# Altium PCB 四轴.PcbDoc
Units mm, origin at the board's own origin, x right, y up, seen from the top; angles counter-clockwise.
Board outline 99.94 x 99.97 mm, 2 copper layers (Top Layer, Bottom Layer); 57 components, 46 nets, 217 pads, 47 vias.
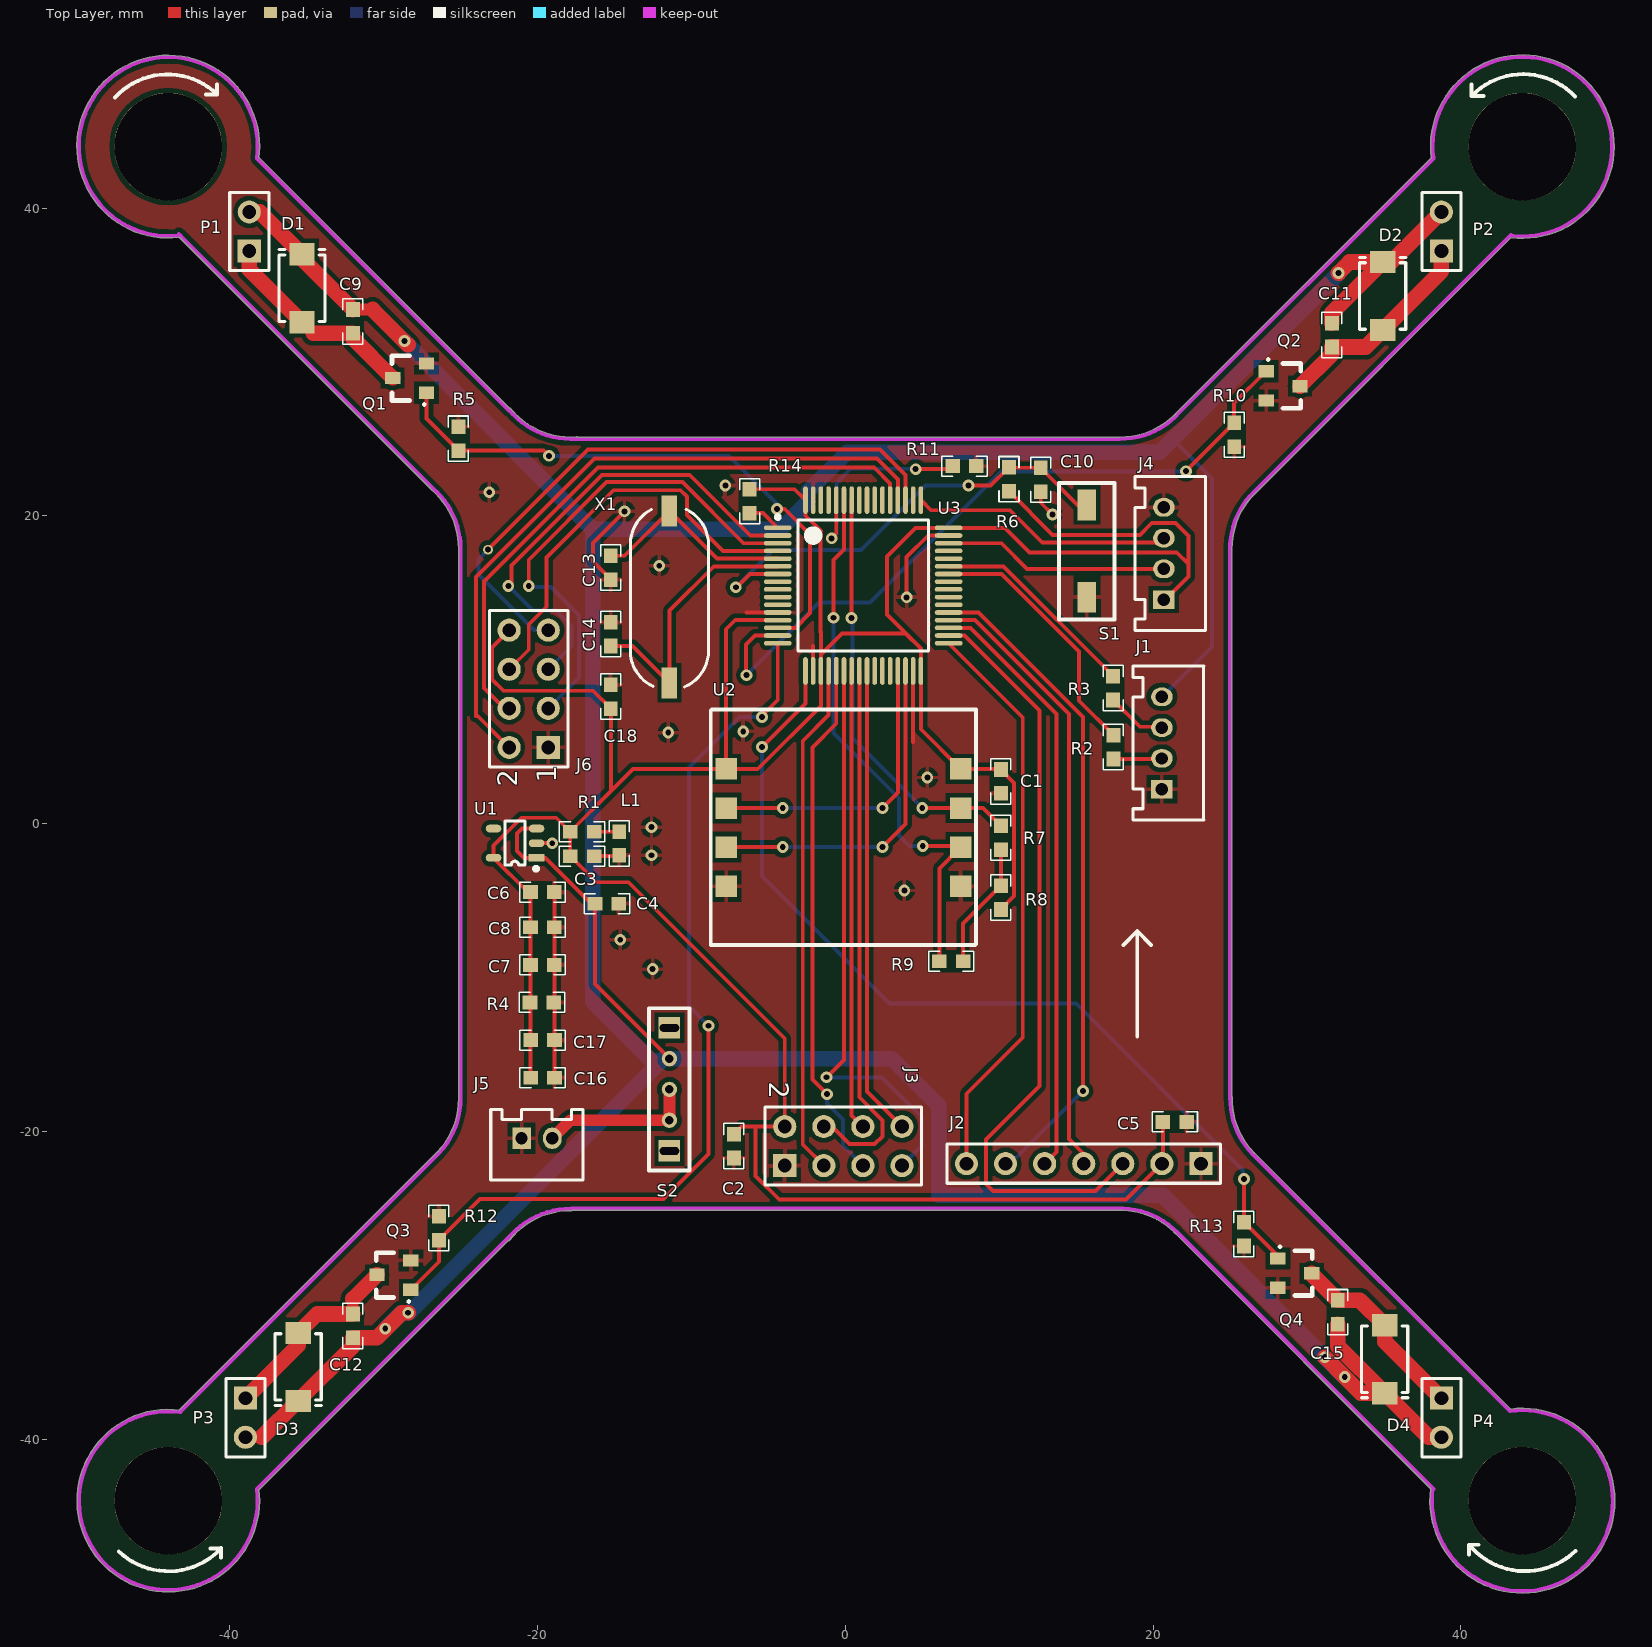
[diagram p0: Top Layer view]
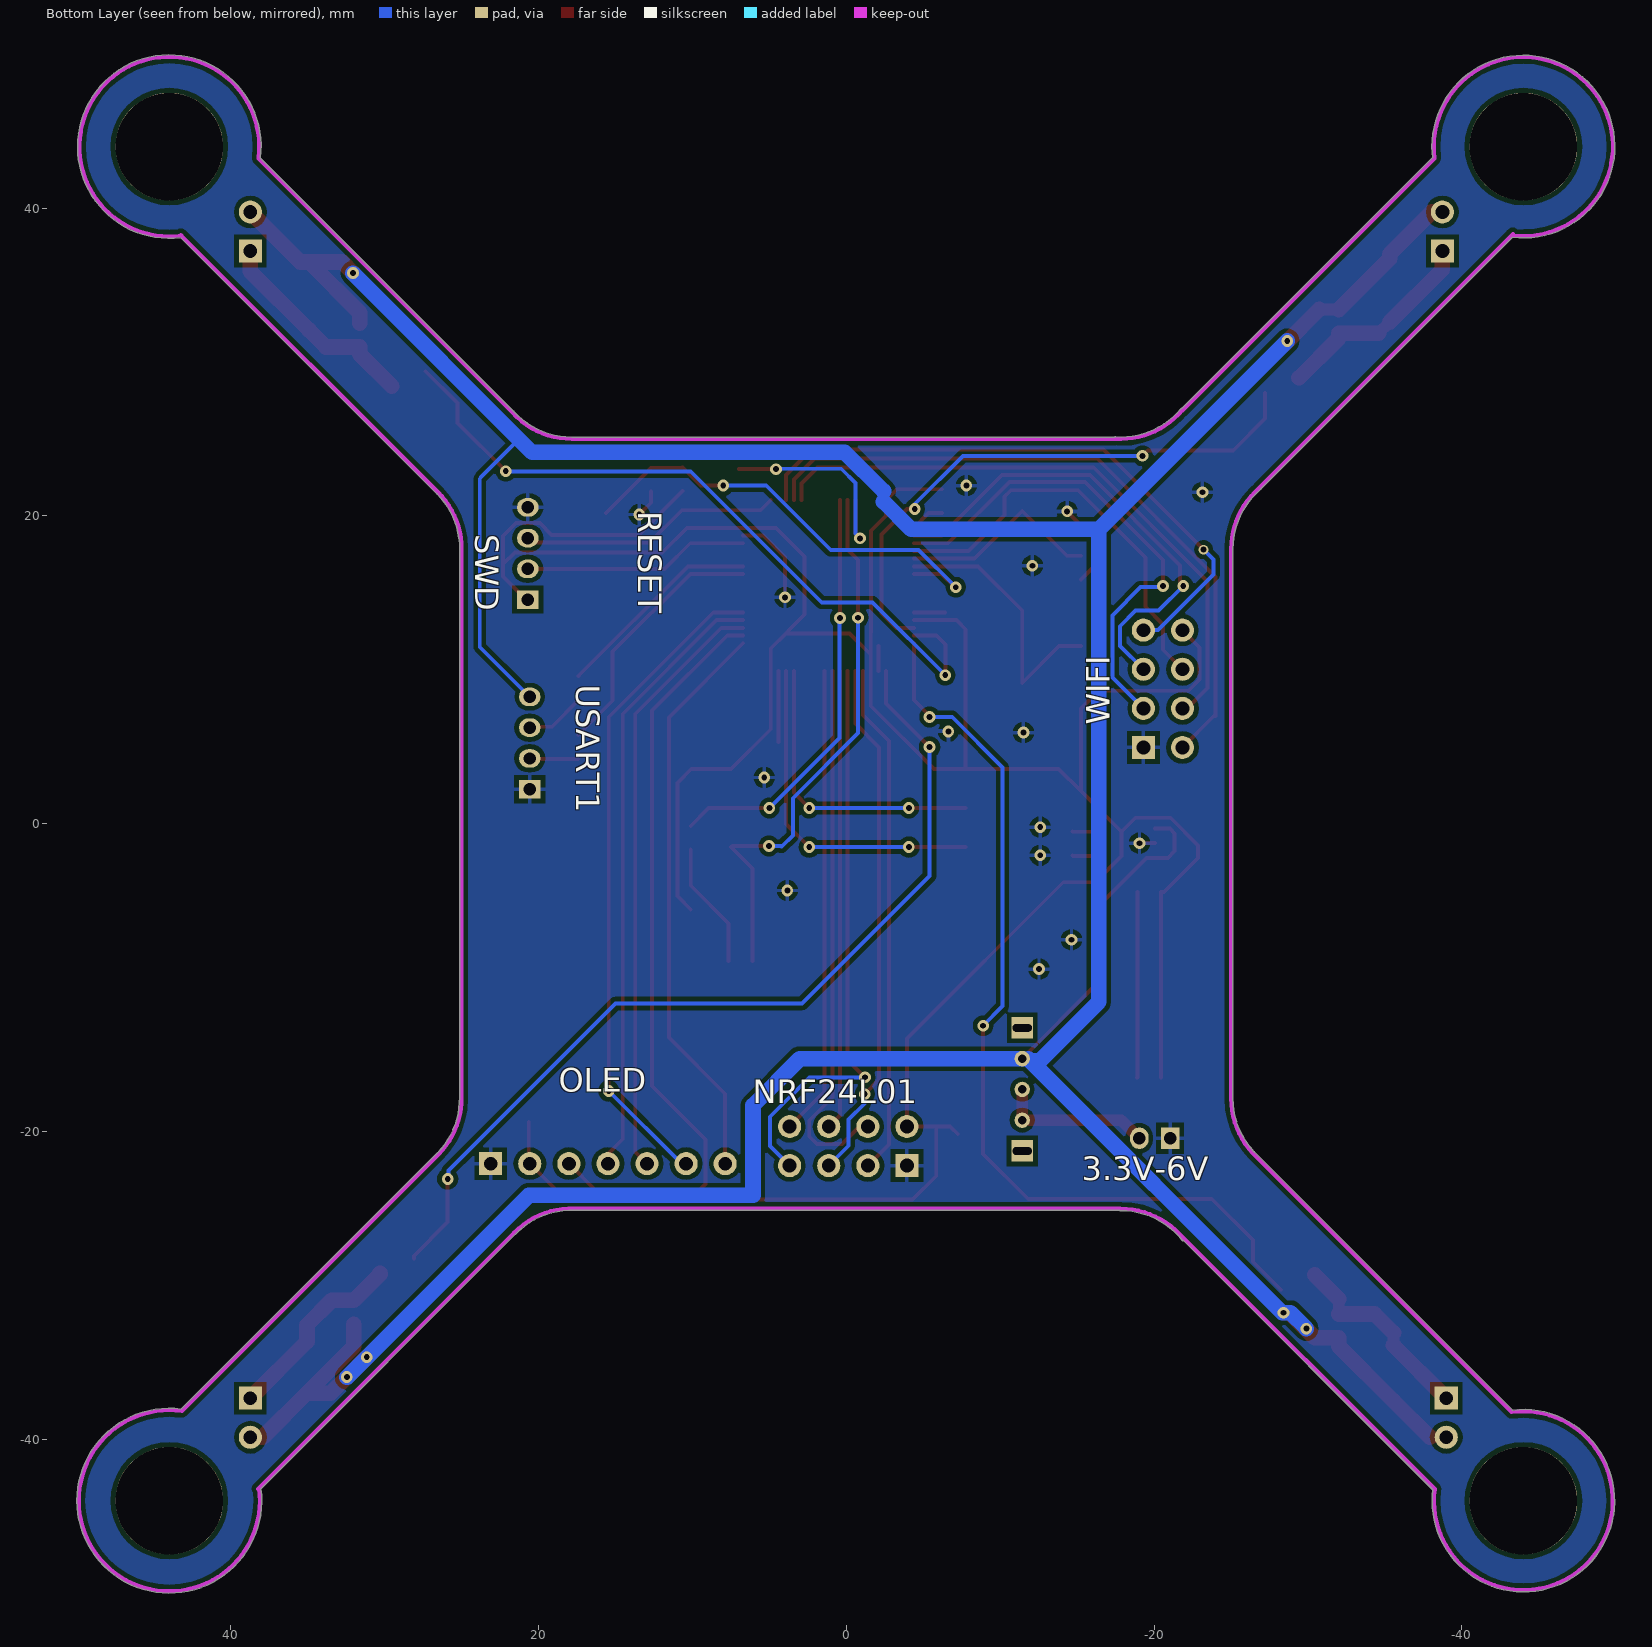
[diagram p1: Bottom Layer view, seen from below]

## Layer stack, top to bottom
Top Layer: signal copper 0.0356
Dielectric: dielectric 0.32, FR-4, Dk 4.8
Bottom Layer: signal copper 0.0356

## Board outline
-43.293,-38.112 ccw(c-44,-44) -38.07,-44 ccw(c-44,-44) -38.112,-43.293 -21.937,-27.118 ccw(c-21.929,-26.991) -21.829,-27.07 cw(c-17.856,-30.226) -17.828,-25.152 ccw(c-17.827,-25.024) -17.752,-25.127 17.63,-25.127 ccw(c17.653,-25.002) 17.658,-25.129 cw(c17.85,-30.2) 21.473,-26.647 ccw(c21.583,-26.583) 21.493,-26.673 38.044,-43.224 ccw(c44,-44) 50.006,-44 ccw(c44,-44) 43.224,-38.044 26.587,-21.406 ccw(c26.496,-21.496) 26.573,-21.395 cw(c30.21,-17.856) 25.136,-17.784 ccw(c25.009,-17.783) 25.136,-17.783 ccw(c25.009,-17.783) 25.127,-17.736 25.127,17.831 ccw(c25,17.831) 25.126,17.847 cw(c30.201,17.856) 26.602,21.433 ccw(c26.55,21.55) 26.64,21.46 43.264,38.084 ccw(c44,44) 49.961,44 ccw(c44,44) 38.084,43.264 21.622,26.802 ccw(c21.703,26.704) 21.608,26.789 cw(c17.852,30.201) 17.84,25.126 ccw(c17.824,25) 17.824,25.127 -17.434,25.127 ccw(c-17.484,25.01) -17.493,25.137 cw(c-17.833,30.2) -21.736,26.957 ccw(c-21.834,26.876) -21.823,27.003 -38.104,43.284 ccw(c-44,44) -38.061,44 ccw(c-44,44) -43.284,38.104 -26.944,21.764 ccw(c-26.824,21.808) -26.907,21.711 cw(c-30.2,17.85) -25.126,17.874 ccw(c-25,17.854) -25.127,17.854 -25.127,-17.856 ccw(c-25,-17.856) -25.126,-17.872 cw(c-30.201,-17.856) -26.494,-21.321 ccw(c-26.434,-21.434) -26.524,-21.344

## Design rules (kind name [scope] priority, off if disabled: settings)
Clearance Clearance_1 [InPolygon] p1: gap=0.3
Clearance mcu [InComponent('U3')] p2: gap=0.178
Clearance [All] p3: gap=0.203
ComponentClearance [All] p1: gap=0.025 collisioncheckmode=3 verticalgap=0.025 showdistances=FALSE
HoleSize [All] p1: absolutevalues=TRUE maxlimit=7.62 minlimit=0.203 maxpercent=80.000 minpercent=20.000
MinimumSolderMaskSliver [All] p1: minsoldermaskwidth=0.127
PolygonConnect [All] p1: connectstyle=Relief reliefconductorwidth=0.254 reliefentries=4 polygonreliefangle="90 Angle"
RoutingVias [All] p1: holewidth=0.381 width=0.762 viastyle="Through Hole" minholewidth=0.127 minwidth=0.254 maxholewidth=1.016 maxwidth=1.27
SilkToSilkClearance [All] p1: silktosilkclearance=0.178
SilkscreenOverComponentPads [All] p1: minsilkscreentomaskgap=0.127
SolderMaskExpansion [All] p1: expansion=0.102
Width [All] p1: maxlimit=1.27 minlimit=0.254 preferedwidth=0.254
23 further rules are at their usual default settings.

## Components (designator, comment, footprint, x,y, rotation, side; value= is the part's Value field where it differs from the comment)
C1 "100nF" 0603 10.109,2.743 r270 top
C2 "100nF" 0603 -7.239,-20.955 r270 top
C3 "100nF" 0603 -17.102,-2.114 r0 top
C4 "1uF" 0603 -15.494,-5.207 r180 top
C5 "100nF" 0603 21.412,-19.38 r0 top
C6 "10uF" 0603 -19.685,-4.445 r0 top
C7 "10uF" 0603 -19.685,-9.176 r180 top
C8 "100nF" 0603 -19.685,-6.731 r180 top
C9 "100nF" 0603 -32.004,32.639 r90 top
C10 "100nF" 0603 12.7,22.352 r270 top
C11 "100nF" 0603 31.623,31.75 r90 top
C12 "100nF" 0603 -32.004,-32.639 r270 top
C13 "20pF" 0603 -15.24,16.637 r90 top
C14 "20pF" 0603 -15.24,12.319 r270 top
C15 "100nF" 0603 32.004,-31.75 r270 top
C16 "1uF" 0603 -19.672,-16.51 r180 top
C17 "100nF" 0603 -19.672,-14.065 r180 top
C18 "100nF" 0603 -15.24,8.255 r90 top
D1 "SS14" SMA -35.306,34.798 r90 top
D2 "SS14" SMA 34.925,34.29 r90 top
D3 "SS14" SMA -35.56,-35.306 r270 top
D4 "SS14" SMA 35.052,-34.798 r270 top
J1 "PH2.0-4P" PH2.0-4P 20.574,7.239 r90 top
J2 "Header 7" HDR1X7 23.114,-22.098 r180 top
J3 "Header 4X2" HDR2X4 -3.937,-22.225 r0 top
J4 "PH2.0-4P" PH2.0-4P 20.701,19.558 r90 top
J5 "Header 2" PH2.0-2P -20.041,-20.447 r0 top
J6 "Header 4X2" HDR2X4 -19.304,4.953 r90 top
L1 "LED" 0603 -14.689,-1.289 r270 top
P1 "Header 2" HDR1X2 -38.735,37.211 r90 top
P2 "Header 2" HDR1X2 38.735,37.211 r90 top
P3 "Header 2" HDR1X2 -38.989,-37.338 r270 top
P4 "Header 2" HDR1X2 38.735,-37.338 r270 top
Q1 "AO3400" SOT-23 -28.321,28.956 r180 top
Q2 "AO3400" SOT-23 28.448,28.448 r0 top
Q3 "AO3400" SOT-23 -29.337,-29.337 r180 top
Q4 "AO3400" SOT-23 29.21,-29.21 r0 top
R1 "1K" 0603 -17.102,-0.527 r180 top
R2 "10R" 0603 17.424,4.978 r90 top
R3 "10R" 0603 17.399,8.814 r90 top
R4 "1K" 0603 -19.717,-11.62 r180 top
R5 "100K" 0603 -25.146,25.019 r270 top
R6 "10K" 0603 10.638,22.386 r90 top
R7 "10K" 0603 10.109,-0.914 r270 top
R8 "0R" 0603 10.109,-4.801 r90 top
R9 "10K" 0603 6.883,-8.941 r0 top
R10 "100K" 0603 25.273,25.273 r90 top
R11 "10K" 0603 7.747,23.241 r0 top
R12 "100K" 0603 -26.416,-26.289 r270 top
R13 "100K" 0603 25.908,-26.67 r90 top
R14 "0R" 0603 -6.223,20.955 r270 top
S1 "SW-PB" SW-KEY 17.501,21.717 r270 top
S2 "SS12D07" SS-12D07 -11.43,-17.272 r270 top
U1 "XC6503D331" SOT23-5 -21.463,-1.27 r180 top
U2 "MPU6050S" MPU6050S -7.747,3.556 r0 top
U3 "STM32F103RCT6" LQFP64_N 1.162,15.475 r0 top
X1 "8M" HC-49SMD -11.43,14.732 r90 top

## Footprints (in the part's own frame and the unit in brackets; to place one, negate y for a bottom-side part, rotate by r counter-clockwise, add the part's x,y. Pads: shape width x height; smd on the part's side, far side on the other; paste and mask are expansions set on the pad)
0603 [mm]
  rect 0.95x0.9 smd: 1(-0.775,0) 2(0.775,0)
  silkscreen extent -1.48,-0.65 1.47,0.65
HC-49SMD [mm]
  rect 2x1 smd: 1(-5.588,0) 2(5.588,0)
  silkscreen extent -5.84,-2.54 5.7,2.54
HDR1X2 [mm] "Connector; Header; 2 Po"
  rect 1.5x1.5 hole 0.9: 1(0,0)
  round 1.5 hole 0.9: 2(2.54,0)
  silkscreen extent -1.27,-1.27 3.81,1.27
HDR1X7 [mm] "Connector; Header; 7 Po"
  rect 1.5x1.5 hole 0.9: 1(0,0)
  round 1.5 hole 0.9: 2(2.54,0) 3(5.08,0) 4(7.62,0) 5(10.16,0) 6(12.7,0) 7(15.24,0)
  silkscreen extent -1.27,-1.27 16.51,1.27
HDR2X4 [mm] "Connector; Header; 4x2 Po"
  rect 1.5x1.5 hole 0.9: 1(0,0)
  round 1.5 hole 0.9: 2(0,2.54) 3(2.54,0) 4(2.54,2.54) 5(5.08,0) 6(5.08,2.54) 7(7.62,0) 8(7.62,2.54)
  silkscreen extent -1.27,-1.27 8.89,3.81
LQFP64_N [mm] "Thin QFP, 64-Leads, Body 10x10mm,"
  oval 1.8x0.3 smd: 1(-5.55,3.75) 2(-5.55,3.25) 3(-5.55,2.75) 4(-5.55,2.25) 5(-5.55,1.75) 6(-5.55,1.25) 7(-5.55,0.75) 8(-5.55,0.25) 9(-5.55,-0.25) 10(-5.55,-0.75) 11(-5.55,-1.25) 12(-5.55,-1.75) 13(-5.55,-2.25) 14(-5.55,-2.75) 15(-5.55,-3.25) 16(-5.55,-3.75) 33(5.55,-3.75) 34(5.55,-3.25) 35(5.55,-2.75) 36(5.55,-2.25) 37(5.55,-1.75) 38(5.55,-1.25) 39(5.55,-0.75) 40(5.55,-0.25) 41(5.55,0.25) 42(5.55,0.75) 43(5.55,1.25) 44(5.55,1.75) 45(5.55,2.25) 46(5.55,2.75) 47(5.55,3.25) 48(5.55,3.75)
  oval 0.3x1.8 smd: 17(-3.75,-5.55) 18(-3.25,-5.55) 19(-2.75,-5.55) 20(-2.25,-5.55) 21(-1.75,-5.55) 22(-1.25,-5.55) 23(-0.75,-5.55) 24(-0.25,-5.55) 25(0.25,-5.55) 26(0.75,-5.55) 27(1.25,-5.55) 28(1.75,-5.55) 29(2.25,-5.55) 30(2.75,-5.55) 31(3.25,-5.55) 32(3.75,-5.55) 49(3.75,5.55) 50(3.25,5.55) 51(2.75,5.55) 52(2.25,5.55) 53(1.75,5.55) 54(1.25,5.55) 55(0.75,5.55) 56(0.25,5.55) 57(-0.25,5.55) 58(-0.75,5.55) 59(-1.25,5.55) 60(-1.75,5.55) 61(-2.25,5.55) 62(-2.75,5.55) 63(-3.25,5.55) 64(-3.75,5.55)
  silkscreen extent -5.67,-4.25 4.25,4.57, body extent -5,-5 5,5, height 1.6
MPU6050S [mm]
  rect 1.4x1.4 smd: 1(0,0) 2(0,-2.54) 3(0,-5.08) 4(0,-7.62) 5(15.24,0) 6(15.24,-2.54) 7(15.24,-5.08) 8(15.24,-7.62)
  silkscreen extent -1,-11.43 16.25,3.88
PH2.0-2P [mm]
  rect 1.2x1.4 hole 0.8: 1(-1,0)
  oval 1.2x1.4 hole 0.8: 2(1,0)
  silkscreen extent -3.01,-2.72 3,1.88
PH2.0-4P [mm]
  rect 1.2x1.4 hole 0.8: 1(-5,0)
  oval 1.2x1.4 hole 0.8: 2(-3,0) 3(-1,0) 4(1,0)
  silkscreen extent -7.01,-2.72 3,1.88
SMA [mm]
  rect 1.45x1.65 smd: 1(-2.21,0) 2(2.21,0)
  silkscreen extent -2.16,-1.5 2.51,1.5
SOT23-5 [mil] "SOT23, 5-Leads, Body 3.1x3.0mm (max), Pitch 0.95mm, IPC Me"
  rect 40x20 smd: 1(-55,37.4)
  oval 40x20 smd: 2(-55,0) 3(-55,-37.4) 4(55,-37.4) 5(55,37.4)
  silkscreen extent -59,-57 26,70
SOT-23 [mm]
  rect 1x0.8 smd: 1(-1.1,0.953) 2(-1.1,-0.953) 3(1.1,-0.013)
  silkscreen extent -0.97,-1.46 1.14,1.71
SS-12D07 [mm]
  round 1 hole 0.55: 1(-2,0) 2(0,0) 3(2,0)
  rect 1.4x1.4 hole 0.5 slot 1.25 at 90 deg: ""(-4,0) ""(4,0)
  silkscreen extent -5.28,-1.33 5.28,1.3
SW-KEY [mm] "R"
  rect 2x1.2 smd: 1(1,-1.8) 2(7,-1.8)
  silkscreen extent -0.43,-3.6 8.45,0

## Part data
C1 C2 C3 C4 C5 C6 C7 C8 C9 C10 C11 C12 C13 C14 C15 C16 C17 C18: library part Cap, "Capacit"
J1 J4: library part "Header 4", "Header, 4-P"
J2: "Header, 7-Pin"
J3 J6: "Header, 4-Pin, Dual row"
J5: "Header, 2-P"
L1: library part L
P1 P2 P3 P4: "Header, 2-Pin"
Q1 Q2 Q3 Q4: library part MOS-N, "N-Channel"
R1 R2 R3 R4 R5 R6 R7 R8 R9 R10 R11 R12 R13 R14: library part Res1, "Resist"
S1: "Switch"
S2: library part S
U1: library part XC6503Dxxx
U3: "256K Flash 48K RAM"
X1: library part XT

## Free pads (board coordinates)
  round 7 hole 7: 0(-44,-44) 0(-44,44) 0(44,-44) 0(44,44)

## Via types
v1: diameter 0.762, hole 0.381, Top Layer to Bottom Layer, tented both sides, 46 vias
v2: diameter 0.635, hole 0.381, Top Layer to Bottom Layer, tented both sides, 1 vias

## Nets (pads, with @x,y where several pads share a name; then routed paths per layer and width w, separated by ;. In a path a pad name is that pad's centre, name@x,y a point inside that pad or via, vN(x,y) a via of type N, cw(c..) or ccw(c..) an arc to the next point about the centre after c; other vN are vias at no path point)
BOOT0: R11.1 U3.60 | length 14.3
  Top Layer w0.254: v1(-0.889,18.542) -0.588,18.843 U3.60 ; v1(4.572,23.038) R11.1@6.972,23.038
  Bottom Layer w0.254: v1(-0.889,18.542) -0.584,18.847 -0.584,22.149 0.33,23.063 4.394,23.063 v1(4.572,23.038)
ESP_CH_PD: J6.4 U3.53 | length 40.1
  Top Layer w0.254: J6.4 -22.149,7.493 -23.47,8.814 -23.47,15.748 -16.078,23.139 1.88,23.139 2.912,22.107 U3.53
ESP_GP0: J6.5 U3.2 | length 31.4
  Top Layer w0.254: v1(-21.898,15.446) -21.692,15.652 -21.692,16.789 -15.824,22.657 -10.109,22.657 -6.177,18.725 U3.2
  Bottom Layer w0.254: v1(-21.898,15.446) -20.295,13.843 -18.796,13.843 -17.78,12.827 -17.78,11.557 J6.5
ESP_GP2: J6.3 U3.3 | length 32.6
  Top Layer w0.254: v1@-20.574,15.367 -20.574,17.145 -15.519,22.2 -10.592,22.2 -6.617,18.225 U3.3
  Bottom Layer w0.254: v1@-20.574,15.367 -19.126,15.367 -17.297,13.538 -17.297,9.5 J6.3
  other v1: -20.574,15.446
ESP_GP16: J6.6 U3.4 | length 27.4
  Top Layer w0.254: J6.6 -20.574,11.303 -20.574,12.954 -19.431,14.097 -19.431,17.297 -15.062,21.666 -10.705,21.666 -10.287,21.248 -10.287,20.066 -7.946,17.725 U3.4
ESP_URXD: J6.7 U3.51 | length 40.1
  Top Layer w0.254: v2(-23.216,17.805) -16.713,24.308 2.261,24.308 3.912,22.656 U3.51
  Bottom Layer w0.254: v2(-23.216,17.805) -23.851,17.17 -23.851,16.18 -20.244,12.573 J6.7
ESP_UTXD: J6.2 U3.52 | length 44.4
  Top Layer w0.254: -24.003,7.005 -24.003,16.027 -16.307,23.724 2.057,23.724 3.412,22.369 U3.52 ; -23.901,7.01 J6.2
GND: C1.2 C2.2 C3.2 C4.1 C5.2 C6.2 C7.1 C8.1 C10.2 C13.1 C14.1 C16.1 C17.1 C18.2 J1.1 J2.1 J3.1 J4.4 J5.1 J6.1 L1.2 Q1.2 Q2.2 Q3.2 Q4.2 R4.1 R5.1 R10.1 R11.2 R12.1 R13.1 S1.2 U1.2 U2.4 U2.8 U3.12 U3.18 U3.31 U3.47 U3.63 | length 36.5
  Top Layer w0.254: U1.2 v1(-19.05,-1.27) ; C6.2 C8.1 C7.1 -18.91,-16.497 C16.1 ; C3.2 -14.739,-2.114 L1.2 ; C13.1 -16.408,17.03 -16.408,18.237 v1(-14.351,20.295) ; -6.41,13.725 U3.12 ; U3.18 -2.088,11.537 ; v1(3.988,14.707) 3.988,17.323 5.39,18.725 U3.47 ; 4.412,5.291 U3.31 ; C10.2 12.7,20.853 v1(13.462,20.091)
  other v1: -12.522,-9.449 -14.63,-7.544 3.835,-4.343 -12.598,-2.057 -12.598,-0.229 5.334,2.997 -11.506,5.918 -6.629,5.994 -12.09,16.764 -23.139,21.539 -7.798,21.971
M1_PWM: Q1.1 R5.2 U3.14 | length 37.5
  Top Layer w0.254: Q1.1 -27.221,26.319 R5.2 -19.596,24.244 v1(-19.253,23.901) ; v1(-4.445,20.447) -3.937,20.447 -2.286,18.796 -2.286,13.685 -3.246,12.725 U3.14
  Bottom Layer w0.254: v1(-19.253,23.901) -7.569,23.901 -4.445,20.777 v1(-4.445,20.447)
M2_PWM: Q2.1 R10.2 U3.15 | length 47
  Top Layer w0.254: v1(-6.426,9.652) -6.452,9.652 -6.452,11.633 -5.86,12.225 U3.15 ; v1(22.136,22.911) R10.2 25.273,27.325 Q2.1
  Bottom Layer w0.254: v1(-6.426,9.652) -1.702,14.376 1.6,14.376 10.109,22.885 v1@22.136,22.885
M3_PWM: Q3.1 R12.2 U3.16 | length 60.8
  Top Layer w0.254: Q3.1 -26.416,-28.468 R12.2 -23.749,-24.397 -11.824,-24.397 -8.89,-21.463 v1(-8.89,-13.132) ; v1(-5.41,6.934) -5.41,7.01 -4.388,8.033 U3.16
  Bottom Layer w0.254: v1(-8.89,-13.132) -10.16,-11.862 -10.16,3.658 -6.883,6.934 v1(-5.41,6.934)
M4_PWM: Q4.1 R13.2 U3.17 | length 60.3
  Top Layer w0.254: v1(-5.41,4.978) -2.588,7.801 U3.17 ; v1(25.908,-23.089) R13.2 28.11,-28.097 Q4.1
  Bottom Layer w0.254: v1(-5.41,4.978) -5.41,-3.404 2.87,-11.684 15.011,-11.684 25.857,-22.53 v1@25.857,-23.089
MPU6050_RX: U2.2 U3.29 | length 19.5
  Top Layer w0.254: U2.2 v1(-4.064,1.016) ; v1(2.413,1.016) 3.412,2.015 U3.29
  Bottom Layer w0.254: v1(-4.064,1.016) v1(2.413,1.016)
MPU6050_SCL: R7.1 U2.6 U3.58 | length 27.5
  Top Layer w0.254: v1(0.406,13.36) 0.406,17.018 0.412,17.024 U3.58 ; v1(5.004,1.016) U2.6 8.954,1.016 R7.1
  Bottom Layer w0.254: v1(0.406,13.36) 0.457,13.31 0.457,5.563 v1(5.004,1.016)
MPU6050_SDA: R9.1 U2.7 U3.59 | length 36.2
  Top Layer w0.254: v1(-0.762,13.386) -0.762,17.145 -0.088,17.819 U3.59 ; v1(5.029,-1.448) 7.417,-1.448 U2.7 6.108,-2.909 R9.1
  Bottom Layer w0.254: v1(-0.762,13.386) -0.762,5.893 3.48,1.651 3.48,-0.762 4.216,-1.499 4.267,-1.448 v1(5.029,-1.448)
MPU6050_TX: U2.3 U3.30 | length 22.2
  Top Layer w0.254: U2.3 v1(-4.064,-1.524) ; v1(2.413,-1.524) 3.912,-0.025 U3.30
  Bottom Layer w0.254: v1(-4.064,-1.524) v1(2.413,-1.524)
NetC9_1: C9.1 D1.1 P1.1 Q1.3 | length 13.6
  Top Layer w0.762: D1.1 D1.1@-34.582,31.864 ; C9.1@-32.004,31.552 C9.1
  Top Layer w1.016: P1.1 -38.735,36.017 D1.1 ; D1.1@-34.582,31.864 C9.1 ; C9.1@-32.004,31.552 Q1.3
NetC11_1: C11.1 D2.1 P2.1 Q2.3 | length 13.9
  Top Layer w1.016: Q2.3 31.623,30.51 C11.1 33.82,30.975 D2.1 38.735,35.89 P2.1
NetC12_1: C12.1 D3.1 P3.1 Q3.3 | length 12.9
  Top Layer w0.762: -35.56,-33.909 D3.1 ; C12.1 -32.004,-30.891
  Top Layer w1.016: P3.1 -35.56,-33.909 ; D3.1 -34.328,-31.864 C12.1 ; -32.004,-30.891 Q3.3
NetC13_2: C13.2 U3.5 X1.2 | length 13.3
  Top Layer w0.254: C13.2 -14.338,17.412 X1.2 -8.335,17.225 U3.5
NetC14_2: C14.2 U3.6 X1.1 | length 17.7
  Top Layer w0.254: C14.2 -13.83,11.544 X1.1 -11.43,13.843 -8.548,16.725 U3.6
NetC15_1: C15.1 D4.1 P4.1 Q4.3 | length 12.4
  Top Layer w1.016: Q4.3 30.31,-29.281 C15.1 33.439,-30.975 D4.1 35.052,-33.655 P4.1
NetJ1_2: J1.2 R2.1 | length 3.1
  Top Layer w0.254: R2.1 20.538,4.203 J1.2@20.551,4.216
NetJ1_3: J1.3 R3.1 | length 3.8
  Top Layer w0.254: R3.1 19.139,6.299 J1.3@20.514,6.299
NetJ5_2: J5.2 S2.2 S2.3 | length 10.1
  Top Layer w0.762: J5.2 -17.866,-19.272 S2.3 S2.2
NetL1_1: L1.1 R1.1 | length 1.6
  Top Layer w0.254: R1.1 -14.702,-0.527 L1.1
NetR7_2: R7.2 R8.2 R9.2 | length 8.3
  Top Layer w0.254: R9.2 7.658,-6.476 R8.2 R7.2
NetR14_2: R14.2 U3.1 | length 2.2
  Top Layer w0.254: R14.2 -5.343,20.18 U3.1
NRF_CE: J3.3 U3.20 | length 33.4
  Top Layer w0.254: J3.3 -2.769,-20.853 -2.769,5.385 -1.088,7.065 U3.20
NRF_CSN: J3.4 U3.24 | length 35.4
  Top Layer w0.254: J3.4 -0.858,-19.685 0.285,-20.828 1.905,-20.828 2.413,-20.32 2.413,-19.279 0.912,-17.778 U3.24
NRF_IRQ: J3.8 U3.25 | length 30.6
  Top Layer w0.254: U3.25 1.412,-17.414 J3.8
NRF_MISO: J3.7 U3.22 | length 37.8
  Top Layer w0.254: v1(-1.219,-16.485) -0.088,-15.353 U3.22
  Bottom Layer w0.254: v1(-1.219,-16.485) 2.388,-16.485 4.953,-19.05 4.953,-20.955 J3.7
NRF_MOSI: J3.6 U3.23 | length 29.9
  Top Layer w0.254: U3.23 0.412,-18.954 J3.6
NRF_SCK: J3.5 U3.21 | length 34.6
  Top Layer w0.254: v1(-1.194,-17.577) -2.134,-16.637 -2.134,4.959 -0.588,6.504 U3.21 ; J3.5@0.686,-22.225 J3.5
  Bottom Layer w0.254: v1(-1.194,-17.577) -1.194,-18.188 -0.152,-19.229 -0.152,-20.93 J3.5
OLED_CS: J2.7 U3.33 | length 37.3
  Top Layer w0.254: U3.33 11.532,6.905 11.532,-13.894 7.874,-17.551 J2.7
OLED_D0_SCK: J2.3 U3.34 | length 50
  Top Layer w0.254: U3.34 7.739,12.225 12.624,7.341 12.624,-17.043 9.144,-20.523 9.144,-23.419 9.601,-23.876 16.256,-23.876 J2.3
OLED_D1_MOSI: J2.4 U3.36 | length 40
  Top Layer w0.254: U3.36 8.441,13.225 14.529,7.137 14.529,-20.498 15.494,-21.463 J2.4
OLED_DC: J2.6 U3.37 | length 42.8
  Top Layer w0.254: U3.37 8.652,13.725 15.443,6.934 v1(15.443,-17.374)
  Bottom Layer w0.254: J2.6 10.719,-22.098 v1(15.443,-17.374)
OLED_RES: J2.5 U3.35 | length 38.9
  Top Layer w0.254: U3.35 8.128,12.725 13.716,7.137 13.716,-21.336 J2.5
RST: C10.1 R6.2 S1.1 U3.7 | length 30.3
  Top Layer w0.254: v1(-7.112,15.367) -7.05,15.367 -6.192,16.225 U3.7 ; v1(8.001,21.971) 9.448,21.971 R6.2 10.672,23.127 C10.1 12.7,23.114 S1.1@15.621,20.193
  Bottom Layer w0.254: v1(-7.112,15.367) -4.699,17.78 1.016,17.78 5.207,21.971 v1(8.001,21.971)
SWCLK: J4.3 U3.49 | length 17.1
  Top Layer w0.254: U3.49 5.566,20.371 10.693,20.371 12.802,18.263 20.406,18.263 J4.3
SWDIO: J4.2 U3.46 | length 14.7
  Top Layer w0.254: U3.46 10.147,18.225 11.814,16.558 J4.2
UART1RX: R3.2 U3.43 | length 13.7
  Top Layer w0.254: U3.43 10.287,16.725 17.399,9.613 R3.2
UART1TX: R2.2 U3.42 | length 16.9
  Top Layer w0.254: U3.42 10.14,16.225 15.189,11.176 15.189,7.989 R2.2
VCC-3.3V: C1.1 C2.1 C3.1 C5.1 C6.1 C7.2 C8.2 C16.2 C17.2 C18.1 J2.2 J3.2 J4.1 J6.8 R1.2 R4.2 R6.1 R8.1 R14.1 U1.5 U2.1 U2.5 U3.13 U3.19 U3.32 U3.48 U3.64 | length 229
  Top Layer w0.254: J6.8 -22.962,11.455 -22.962,9.373 -22.225,8.636 -16.396,8.636 C18.1 -15.24,2.11 ; C16.2 -20.46,-16.497 C7.2 C8.2 C6.1 -20.635,-4.445 U1.5 -22.86,-1.422 -21.057,0.381 -18.785,0.381 R1.2 ; C2.1 -6.744,-19.685 -5.842,-19.685 ; R14.1 -3.293,21.73 U3.64 -2.588,20.012 -1.588,19.012 -1.6,19 -1.6,12.456 -1.588,12.444 U3.19 -1.588,7.658 -5.69,3.556 U2.1 ; U3.13 -7.154,13.225 -7.747,12.632 U2.1 ; -1.588,10.985 -0.203,12.37 3.912,12.37 4.912,11.369 ; R8.1 10.973,-4.712 10.973,2.655 C1.1 10.071,3.556 U2.5 4.912,6.137 U3.32 4.912,11.395 2.718,13.589 2.718,17.374 4.569,19.225 U3.48 10.366,19.225 11.963,17.628 21.539,17.628 22.301,16.866 ; R6.1 13.478,18.771 19.152,18.771 19.914,19.533 21.463,19.533 22.301,18.694 22.301,16.866 ; C5.1 20.637,-22.035 J2.2 18.237,-24.435 -4.293,-24.435 -5.842,-22.885 -5.842,-19.685 ; J4.1 20.806,14.558 22.301,16.053 22.301,16.866 ; R1.2 -15.24,2.11 ; R1.2 C3.1 -16.181,-3.81 -14.097,-3.81 -3.937,-13.97 J3.2 -5.842,-19.685 ; -15.24,2.11 -13.794,3.556 U2.1
VCC-5V: C4.2 C9.2 C11.2 C12.2 C15.2 D1.2 D2.2 D3.2 D4.2 J1.4 P1.2 P2.2 P3.2 P4.2 S2.1 U1.1 U1.3 | length 289.2
  Top Layer w0.254: U1.3 -21.021,-0.32 -21.336,-0.635 -21.336,-1.778 -20.894,-2.22 U1.1 -19.497,-2.22 -16.764,-4.953 -16.269,-4.953 C4.2 -16.269,-10.433 S2.1
  Top Layer w0.762: P3.2 -37.922,-39.878 ; C9.2 -30.722,33.414
  Top Layer w1.016: P1.2 -38.049,39.751 D1.2 -35.306,36.716 C9.2 ; -37.922,-39.878 D3.2 -32.004,-33.96 C12.2 -30.442,-33.414 -28.816,-31.788 v1(-28.41,-31.788) ; -30.722,33.414 v1@-28.423,31.115 ; v1(31.166,-34.671) v1(32.461,-35.966) 33.503,-37.008 D4.2 ; C11.2 31.623,33.198 D2.2 ; C15.2 32.004,-33.96 D4.2 ; v1(32.055,35.789) 32.766,36.5 D2.2 ; P4.2 37.922,-39.878 D4.2 ; P2.2 35.484,36.5 D2.2
  Bottom Layer w0.254: J1.4 23.825,11.49 23.825,22.403 ; 21.234,24.71 21.234,25.019 23.736,22.517
  Bottom Layer w0.762: -12.719,-15.272 S2.1@-11.818,-15.272 ; -2.413,20.93 -2.413,21.615
  Bottom Layer w1.016: v1(-29.896,-32.817) -28.854,-31.775 -28.321,-31.775 S2.1@-11.818,-15.272 ; v1(-28.651,31.369) -16.408,19.126 ; -12.719,-15.272 -16.408,-11.582 -16.408,19.126 ; S2.1@-11.481,-15.272 3.029,-15.272 6.071,-18.313 6.071,-24.155 20.625,-24.155 v1@32.448,-35.979 ; -2.413,20.93 -4.216,19.126 -16.408,19.126 ; -2.413,21.615 0.102,24.13 20.422,24.13 v1@32.067,35.776
pads on no net: S2. U1.4 U3.8 U3.9 U3.10 U3.11 U3.26 U3.27 U3.28 U3.38 U3.39 U3.40 U3.41 U3.44 U3.45 U3.50 U3.54 U3.55 U3.56 U3.57 U3.61 U3.62

## Polygon pours and split planes (outlines as drawn)
GND on Bottom Layer "Bottom Layer-No Net" (solid, remove dead copper, pour order 5): -64.389,59.258 -64.389,-54.991 -63.957,-54.559 66.421,-54.559 66.421,55.448 62.611,59.258
GND on Top Layer "Bottom Layer-No Net" (solid, remove dead copper, pour order 7): -69.063,63.525 -70.333,62.255 -70.333,-61.366 61.316,-61.366 63.881,-58.801 66.853,-55.829 66.853,62.23

## Keep-outs
Keep-Out Layer:
  lines w0.254: -43.318,38.318 -26.816,21.816 ; -43.232,-38.232 -26.434,-21.434 ; -43.213,-38.251 ccw(c-44,-44) -38.245,-43.256 ; -43.211,38.242 cw(c-44,44) -38.238,43.239 -21.855,26.855 ; -38.251,-43.251 -21.338,-26.338 ; -26.824,21.808 cw(c-30.2,17.85) -24.998,17.854 ; -26.429,-21.438 ccw(c-30.201,-17.856) -24.999,-17.856 ; -25,-17.856 -25,17.854 ; -21.929,-26.991 cw(c-17.856,-30.226) -17.827,-25.024 ; -21.834,26.876 ccw(c-17.833,30.2) -17.484,25.01 ; -17.802,-25 17.653,-25 ; -17.484,25 17.824,25 ; 15.875,25 16.364,25 ; 17.653,-25.002 cw(c17.85,-30.2) 21.586,-26.58 ; 17.824,24.999 ccw(c17.852,30.201) 21.703,26.704 ; 21.583,-26.583 38.229,-43.229 ; 21.703,26.703 38.216,43.216 ; 24.999,17.831 cw(c30.201,17.856) 26.544,21.555 ; 25,-17.783 25,17.831 ; 25.009,-17.783 ccw(c30.21,-17.856) 26.495,-21.497 ; 26.496,-21.496 43.184,-38.184 ; 26.55,21.55 43.254,38.254 ; 38.177,-43.192 ccw(c44,-44) 43.192,-38.177 ; 38.214,43.255 cw(c44,44) 43.219,38.218

## Silkscreen, mask and mechanical layers (free items; w line width, h text height)
Top Overlay:
  lines w0.254: -47.456,47.196 cw(c-44.045,44.075) -40.829,47.396 ; -47.219,-47.295 ccw(c-43.994,-43.915) -40.564,-47.087 ; -41.554,47.396 -40.829,47.396 ; -41.259,-47.099 -40.576,-47.099 -40.564,-47.087 ; -40.829,48.045 -40.829,47.396 ; 18.085,-7.874 18.974,-6.985 ; 18.974,-13.843 18.974,-6.985 ; 19.863,-7.874 18.974,-6.985 ; 40.54,-47.515 40.54,-46.863 ; 40.704,48.044 40.704,47.295 ; 41.148,-46.863 40.54,-46.863 ; 41.478,47.295 40.704,47.295 ; 47.432,47.25 ccw(c44.047,44.047) 40.704,47.295 ; 47.453,-47.266 cw(c44.184,-43.853) 40.54,-46.863 ; -40.564,-47.087 -40.564,-47.699 -40.564,-47.087
Bottom Overlay:
  text "RESET" at 13.538,20.295 h1.52 r90
  text "SWD" at 24.105,18.796 h1.52 r90
  text "USART1" at 17.551,9.017 h1.52 r90
  text "WIFI" at -17.12,6.426 h1.52 r270
  text "OLED" at 18.694,-17.424 h1.52
  text "NRF24L01" at 6.096,-18.161 h1.52
  text "3.3V-6V" at -15.291,-23.19 h1.52
Drill Drawing:
  text ".LEGEND" at 3.31,-61.119 h1.52
  text "100 * 100 mm" at -29.278,-61.83 h1.52
  text "Drill Drawing." at 3.437,-64.421 h1.52

## Text inside footprints (layer, text, board x,y; h text height)
J3: Top Overlay "2" at -4.953,-16.764 h1.27 r270
J6: Top Overlay "1" at -18.771,2.667 h1.27 r90; Top Overlay "2" at -21.336,2.413 h1.27 r90